# Altium PCB PCB_Shield_v1.PcbDoc
Units mil, origin at the board's own origin, x right, y up, seen from the top; angles counter-clockwise.
Board outline 3400 x 2200 mil, 2 copper layers (Top Layer, Bottom Layer); 41 components, 63 nets, 210 pads, 12 vias.
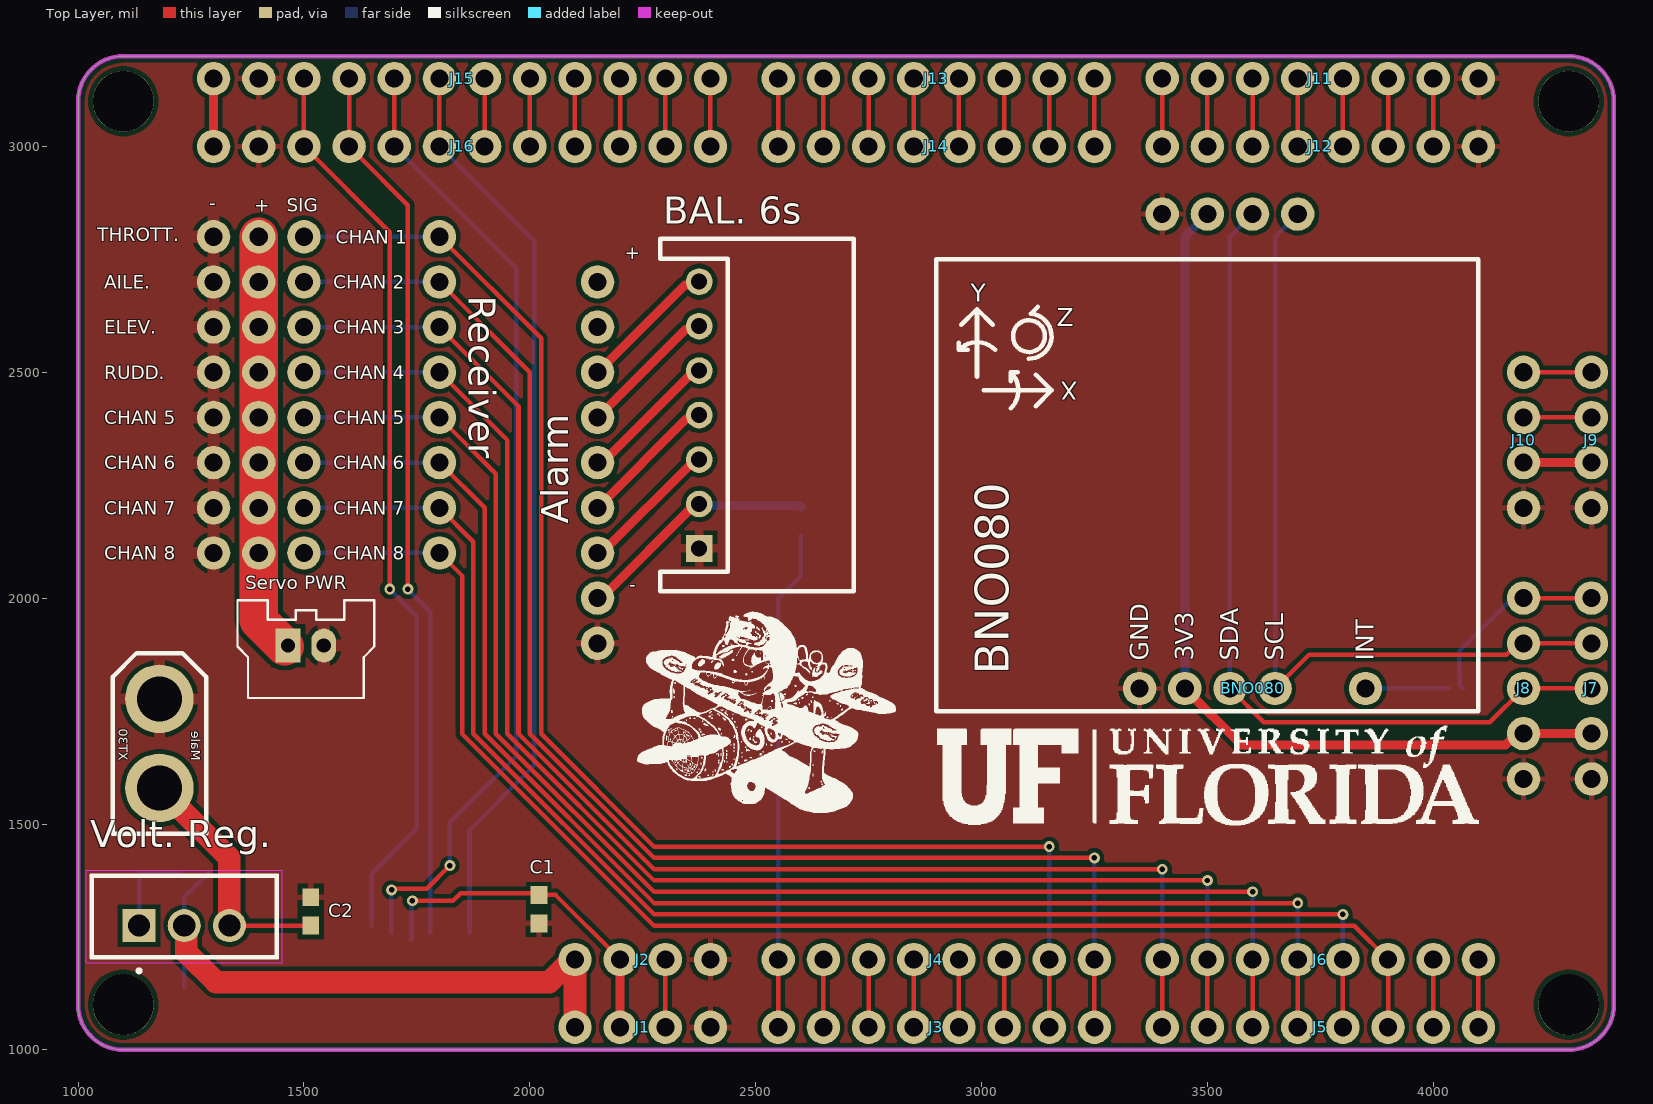
[diagram p0: Top Layer view]
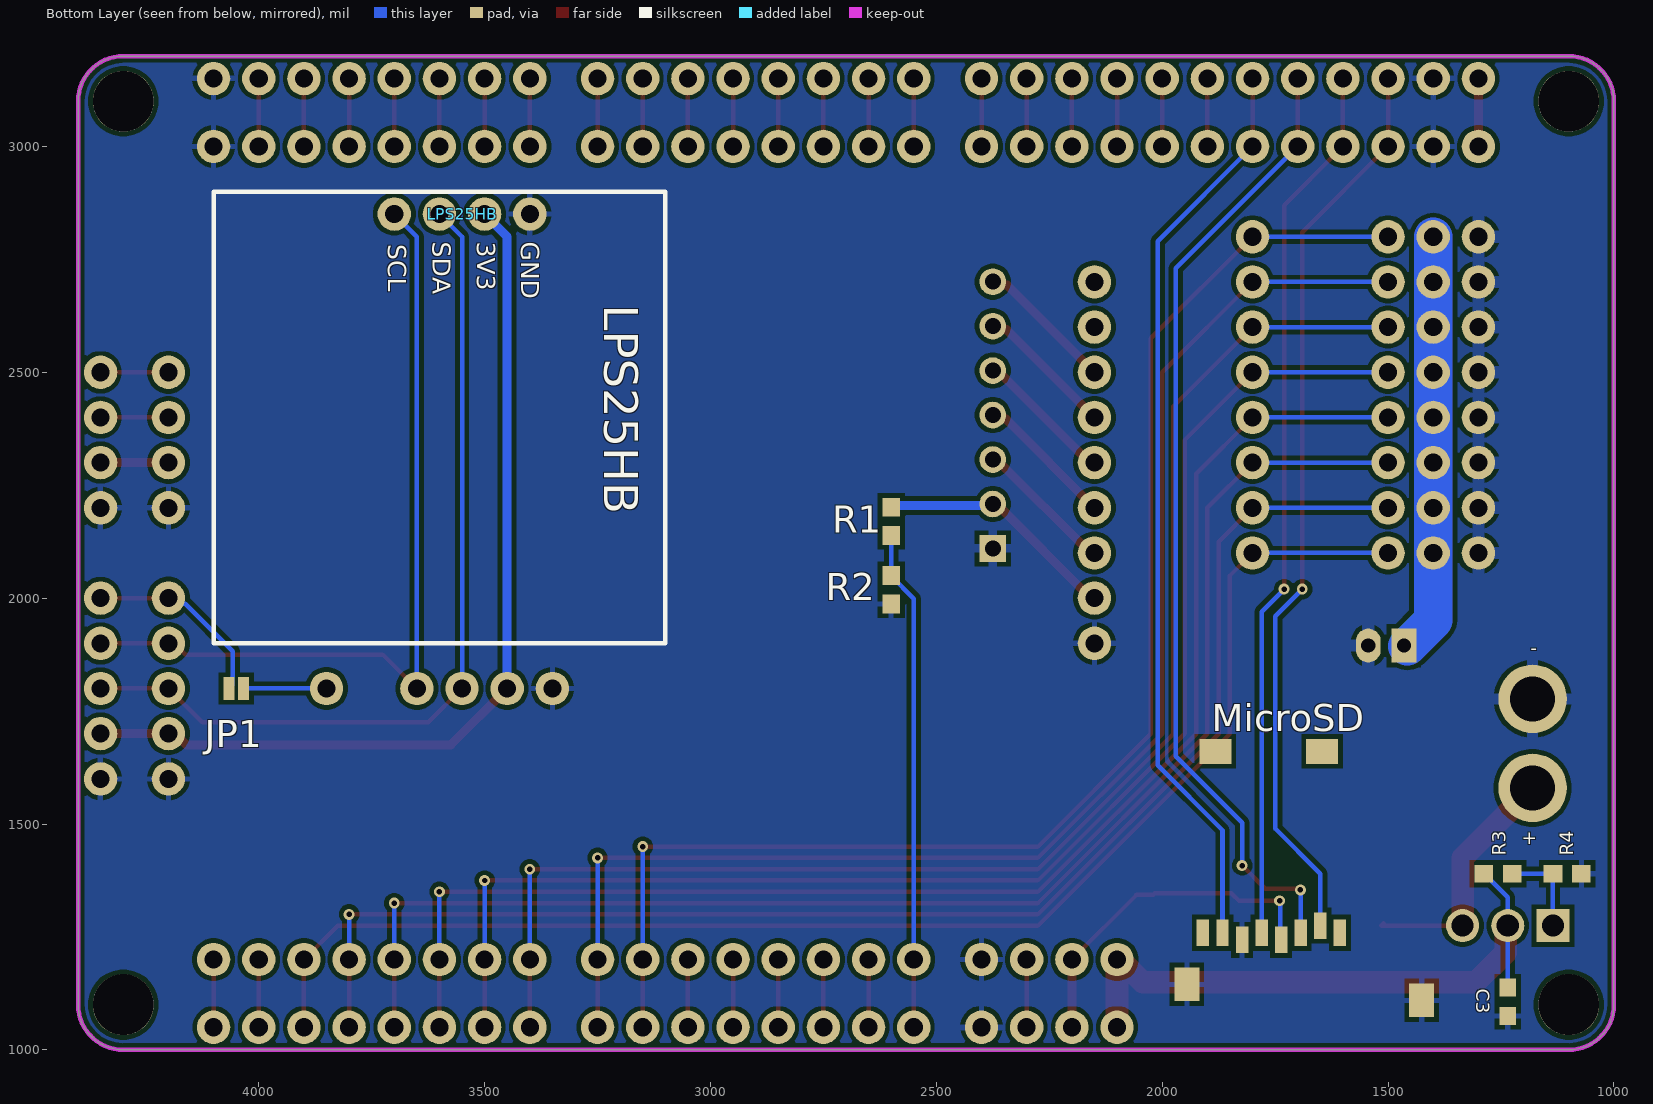
[diagram p1: Bottom Layer view, seen from below]

## Layer stack, top to bottom
Top Solder: solder mask 0.4, Solder Resist, Dk 3.5
Top Layer: signal copper 1.4
Dielectric 1: dielectric 12.6, FR-4, Dk 4.8
Bottom Layer: signal copper 1.4
Bottom Solder: solder mask 0.4, Solder Resist, Dk 3.5

## Board outline
1000,1100 1000,3100 cw(c1100,3100) 1100,3200 4300,3200 cw(c4300,3100) 4400,3100 4400,1100 cw(c4300,1100) 4300,1000 1100,1000 cw(c1100,1100)

## Design rules (kind name [scope] priority, off if disabled: settings)
Clearance [All] p1: gap=6 ignorepadtopadclearanceinfootprint=FALSE except(0: Arc-Hole Track-Hole SMDPad-Hole THPad-Hole Via-Hole Fill-Hole Poly-Hole Region-Hole Text-Hole; 10: Arc-Poly Track-Poly SMDPad-Poly THPad-Poly Via-Poly Fill-Poly)
HoleSize [All] p1: absolutevalues=TRUE maxlimit=135 minlimit=1 maxpercent=80.000 minpercent=20.000
MinimumSolderMaskSliver [All] p1: minsoldermaskwidth=8
PolygonConnect [All] p1: connectstyle=Relief reliefconductorwidth=12.5 reliefentries=4 polygonreliefangle="90 Angle" airgapwidth=10
RoutingVias [All] p1: holewidth=28 width=50 viastyle="Through Hole" minholewidth=28 minwidth=50 maxholewidth=28 maxwidth=50
SilkToSilkClearance [All] p1: silktosilkclearance=6
SilkToSolderMaskClearance [IsPad] p1: minsilkscreentomaskgap=7.5 clearancetoexposedcopper=TRUE
SolderMaskExpansion [All] p1: expansion=4 istentingtop=FALSE
Width [All] p1: maxlimit=100 minlimit=10 preferedwidth=10 minimp=50.000000 maximp=50.000000 favimp=50.000000
26 further rules are at their usual default settings.

## Components (designator, comment, footprint, x,y, rotation, side; value= is the part's Value field where it differs from the comment)
AILE. "" 1X03_NO_SILK 1300,2700 r0 top
Alarm "" 1X09_NO_SILK 2150,1900 r90 top
"BAL. 6s" "JST1x7" JST1x7 2375,2110 r90 top
BNO080 "BNO080" PCBComponent_1#1 3350,1800 r0 top
C1 "Cap" CAPC0603 2020,1311.5 r270 top value=100nF
C2 "Cap" CAPC0603 1515,1306.5 r90 top value=100nF
C3 "Cap" CAPC0603 1235,1106.5 r270 bottom value=1uF
"CHAN 5" "" 1X03_NO_SILK 1300,2400 r0 top
"CHAN 6" "" 1X03_NO_SILK 1300,2300 r0 top
"CHAN 7" "" 1X03_NO_SILK 1300,2200 r0 top
"CHAN 8" "" 1X03_NO_SILK 1300,2100 r0 top locked
ELEV. "" 1X03_NO_SILK 1300,2600 r0 top
J1 "" 1X04_NO_SILK 2400,1050 r180 top
J2 "" 1X04_NO_SILK 2400,1200 r180 top
J3 "" 1X08_NO_SILK 3250,1050 r180 top
J4 "" 1X08_NO_SILK 3250,1200 r180 top
J5 "" 1X08_NO_SILK 4100,1050 r180 top
J6 "" 1X08_NO_SILK 4100,1200 r180 top
J7 "" 1X05_NO_SILK 4350,1600 r90 top
J8 "" 1X05_NO_SILK 4200,1600 r90 top
J9 "" 1X04_NO_SILK 4350,2200 r90 top
J10 "" 1X04_NO_SILK 4200,2200 r90 top
J11 "" 1X08_NO_SILK 4100,3150 r180 top
J12 "" 1X08_NO_SILK 4100,3000 r180 top
J13 "" 1X08_NO_SILK 3250,3150 r180 top
J14 "" 1X08_NO_SILK 3250,3000 r180 top
J15 "" 1X12_NO_SILK 2400,3150 r180 top
J16 "" 1X12_NO_SILK 2400,3000 r180 top
JP1 "" SMT-JUMPER_2_NO_SILK 4050,1800 r0 bottom
LPS25HB "LPS25HB" PCBComponent_1#2 3400,2850 r0 bottom
MicroSD "Micro-SD / Transflash card holder with SPI pinout   For the 3M # 2908-05WB-MG and/or 4UCON #19656 push-push type" MICROSD 1961.02,1678.15 r180 bottom
R1 "Res" RES0603 2600,2170 r270 bottom value=10k
R2 "Res" RES0603 2600,2018.5 r270 bottom value=10k
R3 "Res" RES0603 1256.5,1390 r180 bottom value=300
R4 "Res" RES0603 1103.5,1390 r180 bottom value=1.05k
Receiver "" 1X08_NO_SILK 1800,2100 r90 top
RUDD. "" 1X03_NO_SILK 1300,2500 r0 top
"Servo PWR" "2-pin Vert Sherlock" MOLEX-HDR-1X2-SHERLOCK-VERT 1465,1895 r180 top
THROTT. "" 1X03_NO_SILK 1300,2800 r0 top
"Volt. Reg." "Check prices" TO254P1054X470X1955-3 1235,1275 r0 top
XT30 "XT30" PCBCOMPONENT_1 1180,1580 r90 top

## Footprints (in the part's own frame and the unit in brackets; to place one, negate y for a bottom-side part, rotate by r counter-clockwise, add the part's x,y. Pads: shape width x height; smd on the part's side, far side on the other; paste and mask are expansions set on the pad)
1X03_NO_SILK [mil]
  round 74 hole 40: 1(0,0) 2(100,0) 3(200,0)
1X04_NO_SILK [mil]
  round 74 hole 40: 1(0,0) 2(100,0) 3(200,0) 4(300,0)
1X05_NO_SILK [mil]
  round 74 hole 40: 1(0,0) 2(100,0) 3(200,0) 4(300,0) 5(400,0)
1X08_NO_SILK [mil]
  round 74 hole 40: 1(0,0) 2(100,0) 3(200,0) 4(300,0) 5(400,0) 6(500,0) 7(600,0) 8(700,0)
  body extent -60,-49 760,49, height 197
1X09_NO_SILK [mil]
  round 74 hole 40: 1(0,0) 2(100,0) 3(200,0) 4(300,0) 5(400,0) 6(500,0) 7(600,0) 8(700,0) 9(800,0)
  body extent -60,-49 860,49, height 197
1X12_NO_SILK [mil]
  round 74 hole 40: 1(0,0) 2(100,0) 3(200,0) 4(300,0) 5(400,0) 6(500,0) 7(600,0) 8(700,0) 9(800,0) 10(900,0) 11(1000,0) 12(1100,0)
CAPC0603 [mm] "Chip Capacitor, 2-Leads, Body 1.60x0.80mm, IPC Medium Density"
  rect 1x0.95 smd: 1(-0.8,0) 2(0.8,0)
  body extent -0.88,-0.48 0.87,0.48, height 0.8
JST1x7 [mm]
  rect 1.5x1.5 hole 0.9: 1(0,0)
  round 1.5 hole 0.9: 2(2.5,0) 3(5,0) 4(7.5,0) 5(10,0) 6(12.5,0) 7(15,0)
  silkscreen extent -2.4,-8.7 17.43,2.2, body extent -2.45,-9.2 17.45,2.35, height 6.17
MICROSD [mm]
  rect 0.7x1.5 smd: 1(9,-10.64) 2(7.9,-10.24) 3(6.8,-10.64) 4(5.7,-11.04) 5(4.6,-10.64) 6(3.5,-11.04) 7(2.4,-10.64) 8(1.3,-10.64)
  rect 1.8x1.4 smd: CD1(2,-0.44) CD2(8,-0.44)
  rect 1.4x1.9 smd: MT1(0.4,-13.54) MT2(13.6,-14.44)
  body extent -0.13,-15.32 13.97,0.13, height 1.85
MOLEX-HDR-1X2-SHERLOCK-VERT [mm]
  rect 1.397x1.905 hole 0.8: 1(0,0)
  oval 1.397x1.905 hole 0.8: 2(-2,0)
  silkscreen extent -4.85,-2.55 2.85,2.95, body extent -4.87,-2.59 2.83,2.96, height 8.5
PCBComponent_1#1 [mil]
  round 74 hole 40: 1(0,0) 2(100,0) 3(200,0) 4(300,0) 5(500,0)
  silkscreen extent -450,-50 750,950
PCBComponent_1#2 [mil]
  round 74 hole 40: 1(0,0) 2(100,0) 3(200,0) 4(300,0)
  silkscreen extent -300,-50 700,950
PCBCOMPONENT_1 [mil]
  round 151.7 hole 100: 1(0,0) 2(197,0)
  silkscreen extent -102,-104 298,104, body extent -105,-105 305,104, height 496
RES0603 [mm] "Chip Resistor, 2-Leads, Body 1.60x0.80mm, IPC Medium Density"
  rect 1.05x1 smd: 1(-0.8,0) 2(0.8,0)
  body extent -0.88,-0.48 0.87,0.47, height 0.8
SMT-JUMPER_2_NO_SILK [mil]
  rect 25x50 smd paste+0: 1(-16,0) 2(16,0)
TO254P1054X470X1955-3 [mil]
  rect 73.23x73.23 / inner round 67.66 / far side rect 73.23x73.23 hole 48.82: 1(-100,0)
  round 73.23 hole 48.82: 2(0,0) 3(100,0)
  Top Layer keep-out lines w1.97: -217.32,-82.28 217.32,-82.28 217.32,122.44 -217.32,122.44 -217.32,-82.28
  silkscreen extent -207,-104 207,113, body extent -200,-70 200,110, height 770

## Part data
AILE. "CHAN 5" "CHAN 6" "CHAN 7" "CHAN 8" ELEV. RUDD. THROTT.: library part CONN_031X03_NO_SILK, Package=1X03_NO_SILK, DeviceName=1X03_NO_SILK, DeviceSetName=CONN_03, GateName_1=J$1, LibraryName=SparkFun-Connectors, SymbolName_1=CONN_03
Alarm: library part CONN_09NO_SILK, Package=1X09_NO_SILK, DeviceName=NO_SILK, DeviceSetName=CONN_09, GateName_1=J1, LibraryName=SparkFun-Connectors, SymbolName_1=CONN_09
"BAL. 6s": "CONN HEADER XH SIDE 7POS 2.5MM", Supplier Part Number 1=455-2240-ND, Supplier 1=Digi-Key
BNO080: "BNO080 Breakout Board"
C1 C2 C3: Supplier Part Number 1=1276-1000-1-ND, Supplier 1=Digi-Key
J1 J2 J9 J10: library part CONN_041X04_NO_SILK, Package=1X04_NO_SILK, DeviceName=1X04_NO_SILK, DeviceSetName=CONN_04, GateName_1=J1, LibraryName=SparkFun-Connectors, PROD_ID=CONN-09696, SymbolName_1=CONN_04
J3 J4 J5 J6 J11 J12 J13 J14 Receiver: library part CONN_08NO_SILK_FEMALE_PTH, Package=1X08_NO_SILK, DeviceName=NO_SILK_FEMALE_PTH, DeviceSetName=CONN_08, GateName_1=G$1, LibraryName=SparkFun-Connectors, PROD_ID=CONN-08438, SymbolName_1=CONN_08
J7 J8: library part CONN_05NO_SILK, Package=1X05_NO_SILK, DeviceName=NO_SILK, DeviceSetName=CONN_05, GateName_1=G$1, LibraryName=SparkFun-Connectors, SymbolName_1=CONN_05
J15 J16: library part CONN_12NO_SILK, Package=1X12_NO_SILK, DeviceName=NO_SILK, DeviceSetName=CONN_12, GateName_1=G$1, LibraryName=SparkFun-Connectors, SymbolName_1=CONN_12
JP1: library part JUMPER-SMT_2_NO_SILK, Package=SMT-JUMPER_2_NO_SILK, DeviceName=_SILK, DeviceSetName=JUMPER-SMT_2_NO, GateName_1=G$1, LibraryName=SparkFun-Jumpers, SymbolName_1=SMT-JUMPER_2_NO
LPS25HB: "LPS25HB Breakout Board"
MicroSD: library part MICROSD, DeviceSetName=MICROSD, GateName_1=G$1, LibraryName=adafruit, Package=MICROSD, SymbolName_1=TRANSFLASH
R1 R2 R3 R4: Supplier Part Number 1=RMCF0603JT10K0CT-ND, Supplier 1=Digi-Key
"Servo PWR": library part MOLEX-HDR-1x2-SHERLOCK_VERT, "Header, Molex, 2mm Pitch Sherlock Header, Single Row, Vertical, 2 Circuits, Length 3.3mm, 0353620250"
"Volt. Reg.": library part LM338T, Package="TO-220-3 Texas Instruments", Availability=Warning, DeviceSetName=LM338T, GateName_1=G$1, LibraryName=LM338T, MF="Texas Instruments", MP=LM338T/NOPB, Price=None, Purchase-URL=https://pricing.snapeda.com/search/part/LM338T/NOPB/?ref=eda, SymbolName_1=LM338T

## Free pads (board coordinates)
  round 135 hole 135 unplated: 1(1100,1100) 2(4300,1100) 3(4300,3100) 4(1100,3100)

## Via types
v1: diameter 24, hole 12, Top Layer to Bottom Layer, 12 vias

## Nets (pads, with @x,y where several pads share a name; then routed paths per layer and width w, separated by ;. In a path a pad name is that pad's centre, name@x,y a point inside that pad or via, vN(x,y) a via of type N, cw(c..) or ccw(c..) an arc to the next point about the centre after c; other vN are vias at no path point)
"3V3 S1": C1.1 J1.3 J2.3 MicroSD.4 | length 765.8
  Top Layer w10: v1(1740,1330) 1830,1330 1847,1347 2015.99,1347 C1.1 2057.01,1342.99 J2.3
  Top Layer w20: J1.3 J2.3
  Bottom Layer w10: MicroSD.4 1738.31,1245.19 1738.31,1328.31 v1(1740,1330)
"3V3 S2": BNO080.2 J7.2 J8.2 LPS25HB.2 | length 2032.8
  Top Layer w20: BNO080.2 3575,1675 4160.39,1675 4185.39,1700 J8.2 J7.2
  Bottom Layer w20: BNO080.2 3450,2800 LPS25HB.2
"3V3 S3": J9.2 J10.2 | length 150
  Top Layer w20: J10.2 J9.2
"3V3 S4": J15.12 J16.12 | length 150
  Top Layer w20: J16.12 J15.12
A0: J3.8 J4.8 R1.2 R2.1 | length 1109.2
  Top Layer w10: J3.8 J4.8
  Bottom Layer w10: J4.8 2550,1999.02 2600,2049.02 R2.1 R1.2
A1: J3.7 J4.7 | length 150
  Top Layer w10: J3.7 J4.7
"CAN RX": J11.7 J12.7 | length 150
  Top Layer w10: J12.7 J11.7
"CAN TX": J11.6 J12.6 | length 150
  Top Layer w10: J12.6 J11.6
"CELL 1": "BAL. 6s.2" Alarm.2 R1.1 | length 561.3
  Top Layer w20: Alarm.2@2149,2001 Alarm.2 2158.29,2000 2366.71,2208.43 2375,2208.43
  Bottom Layer w20: Alarm.2 Alarm.2@2160.35,2000 ; 2364.65,2208.43 2375,2208.43 2378.46,2204.96 2596.54,2204.96 R1.1
"CELL 2": "BAL. 6s.3" Alarm.3 | length 333
  Top Layer w20: Alarm.3 2159.07,2100 2365.93,2306.85 2375,2306.85
  Bottom Layer w20: Alarm.3 Alarm.3@2161.71,2100 ; 2364.43,2306.85 2375,2306.85
"CELL 3": "BAL. 6s.4" Alarm.4 | length 337.1
  Top Layer w20: Alarm.4@2148.28,2198.28 Alarm.4 2347.8,2397.8 2367.53,2397.8 2375,2405.28 2374.43,2405.85
  Bottom Layer w20: Alarm.4 Alarm.4@2163.28,2200 ; 2364.43,2405.28 2375,2405.28
"CELL 4": "BAL. 6s.5" Alarm.5 | length 328.7
  Top Layer w20: Alarm.5@2146.7,2296.7 Alarm.5 2160.73,2300 2364.43,2503.7 2375,2503.7
  Bottom Layer w20: Alarm.5 Alarm.5@2160.33,2310.33
"CELL 5": "BAL. 6s.6" Alarm.6 | length 315.4
  Top Layer w20: Alarm.6@2145.28,2395.28 Alarm.6 2344.65,2594.65 2367.53,2594.65 2375,2602.13
"CELL 6": "BAL. 6s.7" Alarm.7 | length 317
  Top Layer w20: Alarm.7@2143.7,2493.7 Alarm.7 2343.08,2693.08 2367.53,2693.08 2375,2700.55
CIPO: J15.7 J16.7 MicroSD.7 | length 2037.2
  Top Layer w10: J16.7 J15.7
  Bottom Layer w10: J16.7 2010,2790 2010,1630 1866.53,1486.53 MicroSD.7
CIPO1: J15.3 J16.3 | length 150
  Top Layer w10: J16.3 J15.3
COPI: J15.8 J16.8 MicroSD.3 | length 2161.1
  Top Layer w10: v1(1694,1354) 1696.54,1356.54 1771.54,1356.54 v1(1823,1408) ; J16.8 J15.8
  Bottom Layer w10: MicroSD.3 1693.3,1353.3 v1(1694,1354) ; J16.8 1970,2730 1970,1650 1823,1503 v1(1823,1408)
COPI1: J15.2 J16.2 | length 150
  Top Layer w10: J16.2 J15.2
CS: J15.10 J16.10 MicroSD.2 | length 2019.9
  Top Layer w10: J15.10 J16.10 1690,2810 v1(1690,2020)
  Bottom Layer w10: MicroSD.2 1650,1390 1749.92,1489.92 1749.92,1960.08 v1(1690,2020)
CS1: J15.6 J16.6 | length 150
  Top Layer w10: J16.6 J15.6
CTS: J13.2 J14.2 | length 150
  Top Layer w10: J14.2 J13.2
D0: J11.3 J12.3 | length 150
  Top Layer w10: J12.3 J11.3
D1: J11.2 J12.2 | length 150
  Top Layer w10: J12.2 J11.2
DAT1: J15.4 J16.4 | length 150
  Top Layer w10: J16.4 J15.4
DAT2: J15.5 J16.5 | length 150
  Top Layer w10: J16.5 J15.5
G0: J3.2 J4.2 Receiver.8 THROTT..3 | length 3121.8
  Top Layer w10: Receiver.8 2025,2575 2025,1700 2275,1450 v1(3150,1450) ; J3.2 J4.2
  Bottom Layer w10: THROTT..3 Receiver.8 ; J4.2 v1(3150,1450)
G1: AILE..3 J3.1 J4.1 Receiver.7 | length 3121.8
  Top Layer w10: Receiver.7 2000,2500 2000,1700 2275,1425 v1(3250,1425) ; J3.1 J4.1
  Bottom Layer w10: AILE..3 Receiver.7 ; J4.1 v1(3250,1425)
G2: ELEV..3 J5.8 J6.8 Receiver.6 | length 3171.8
  Top Layer w10: Receiver.6 1975,2425 1975,1700 2275,1400 v1(3400,1400) ; J5.8 J6.8
  Bottom Layer w10: ELEV..3 Receiver.6 ; J6.8 v1(3400,1400)
G3: J5.7 J6.7 Receiver.5 RUDD..3 | length 3171.8
  Top Layer w10: Receiver.5 1950,2350 1950,1700 2275,1375 v1(3500,1375) ; J5.7 J6.7
  Bottom Layer w10: RUDD..3 Receiver.5 ; J6.7 v1(3500,1375)
G4: "CHAN 5.3" J5.6 J6.6 Receiver.4 | length 3171.8
  Top Layer w10: Receiver.4 1925,2275 1925,1700 2275,1350 v1(3600,1350) ; J5.6 J6.6
  Bottom Layer w10: 1500,2400 Receiver.4 ; J6.6 v1(3600,1350)
G5: "CHAN 6.3" J5.5 J6.5 Receiver.3 | length 3171.8
  Top Layer w10: Receiver.3 1900,2200 1900,1700 2275,1325 v1(3700,1325) ; J5.5 J6.5
  Bottom Layer w10: 1500,2300 Receiver.3 ; J6.5 v1(3700,1325)
G6: "CHAN 7.3" J5.4 J6.4 Receiver.2 | length 3171.8
  Top Layer w10: Receiver.2 1875,2125 1875,1700 2275,1300 v1(3800,1300) ; J5.4 J6.4
  Bottom Layer w10: 1500,2200 Receiver.2 ; J6.4 v1(3800,1300)
G7: "CHAN 8.3" J5.3 J6.3 Receiver.1 | length 3127.8
  Top Layer w10: Receiver.1 1850,2050 1850,1700 2275,1275 3825,1275 J6.3 J5.3
  Bottom Layer w10: 1500,2100 Receiver.1
G8: J5.2 J6.2 | length 150
  Top Layer w10: J5.2 J6.2
G9: J3.3 J4.3 | length 150
  Top Layer w10: J3.3 J4.3
G10: J3.4 J4.4 | length 150
  Top Layer w10: J3.4 J4.4
G11: J5.1 J6.1 | length 150
  Top Layer w10: J5.1 J6.1
GND: "BAL. 6s.1" "CHAN 5.1" "CHAN 6.1" "CHAN 7.1" "CHAN 8.1" "Servo PWR.2" AILE..1 Alarm.1 BNO080.1 C1.2 C2.2 C3.2 ELEV..1 J1.1 J2.1 J7.1 J8.1 J9.1 J10.1 J11.1 J12.1 J15.11 J16.11 LPS25HB.1 MicroSD.6 MicroSD.MT1 MicroSD.MT2 R2.2 R4.2 RUDD..1 THROTT..1 XT30.2 | length 25.8
  Top Layer w20: J16.11@1397.62,2997.62 J16.11
  Bottom Layer w20: THROTT..1 THROTT..1@1303.16,2803.16 ; J16.11@1397.62,2997.62 J16.11 ; Alarm.1 Alarm.1@2160.33,1910.33
"I2C CLK": J13.4 J14.4 | length 150
  Top Layer w10: J14.4 J13.4
"I2C FS": J13.5 J14.5 | length 150
  Top Layer w10: J14.5 J13.5
"I2C INT": J7.5 J8.5 JP1.2 | length 427.2
  Top Layer w10: J8.5 J7.5
  Bottom Layer w10: JP1.2 4058.5,1807.5 4058.5,1824.86 4057.5,1825.86 4057.5,1882.5 4162.75,1987.75 4187.75,1987.75 J8.5
"I2C SDI": J13.6 J14.6 | length 150
  Top Layer w10: J14.6 J13.6
"I2C SDO": J13.7 J14.7 | length 150
  Top Layer w10: J14.7 J13.7
MCLK: J13.8 J14.8 | length 150
  Top Layer w10: J14.8 J13.8
NetBNO080_5: BNO080.5 JP1.1 | length 184
  Bottom Layer w10: BNO080.5 JP1.1
NetR3_2: "Volt. Reg..1" R3.2 R4.1 | length 205
  Bottom Layer w10: 1135,1275 R4.1 R3.2
PWM0: J3.6 J4.6 | length 150
  Top Layer w10: J3.6 J4.6
PWM1: J3.5 J4.5 | length 150
  Top Layer w10: J3.5 J4.5
RESET: J1.2 J2.2 | length 150
  Top Layer w10: J1.2 J2.2
RTS: J13.3 J14.3 | length 150
  Top Layer w10: J14.3 J13.3
RX: J11.8 J12.8 | length 150
  Top Layer w10: J12.8 J11.8
RX2: J11.4 J12.4 | length 150
  Top Layer w10: J12.4 J11.4
SCK: J15.9 J16.9 MicroSD.5 | length 1973.5
  Top Layer w10: J15.9 1600,2985.91 1614.09,2985.91 1730,2870 v1(1730,2020)
  Bottom Layer w10: v1(1730,2020) 1779.92,1970.08 MicroSD.5
SCK1: J15.1 J16.1 | length 150
  Top Layer w10: J16.1 J15.1
SCL: BNO080.4 J7.4 J8.4 LPS25HB.4 | length 1812.1
  Top Layer w10: BNO080.4 3725,1875 4162.14,1875 4187.14,1900 J7.4
  Bottom Layer w10: BNO080.4 3650,2800 LPS25HB.4
SCL1: J9.4 J10.4 | length 150
  Top Layer w10: J10.4 J9.4
SDA: BNO080.3 J7.3 J8.3 LPS25HB.3 | length 1932.8
  Top Layer w10: BNO080.3 3625,1725 4125,1725 J8.3 J7.3
  Bottom Layer w10: BNO080.3 3550,2800 LPS25HB.3
SDA1: J9.3 J10.3 | length 150
  Top Layer w10: J10.3 J9.3
"Servo VCC": "CHAN 5.2" "CHAN 6.2" "CHAN 7.2" "CHAN 8.2" "Servo PWR.1" AILE..2 ELEV..2 RUDD..2 THROTT..2 | length 1861
  Top Layer w85: THROTT..2 AILE..2 ELEV..2 RUDD..2 1400,2400 1400,2300 1400,2200 1400,2100 1400,1950.47 1457.58,1892.88
  Bottom Layer w85: THROTT..2 AILE..2 ELEV..2 RUDD..2 1400,2400 1400,2300 1400,2200 1400,2100 1400,1950.71 1457.1,1893.62
TX: J13.1 J14.1 | length 150
  Top Layer w10: J14.1 J13.1
TX2: J11.5 J12.5 | length 150
  Top Layer w10: J12.5 J11.5
VIN: "Volt. Reg..2" C3.1 J1.4 J2.4 R3.1 | length 1394.2
  Top Layer w50: 1235,1275 1239.44,1270.56 1239.44,1215.56 1305,1150 2043.51,1150 2093.51,1200 J2.4 J1.4
  Bottom Layer w10: C3.1 1235,1275 1235,1337.99 1287.01,1390 R3.1
"VIN REG": "Volt. Reg..3" C2.1 XT30.1 | length 556.3
  Top Layer w10: 1335,1275 1510,1275 C2.1 C2.1@1510,1280
  Top Layer w50: XT30.1 1335,1425 1335,1275
pads on no net: Alarm.8 Alarm.9 MicroSD.1 MicroSD.8 MicroSD.CD1 MicroSD.CD2

## Polygon pours and split planes (outlines as drawn)
GND on Top Layer "GND_L01_P000" (solid, remove dead copper, pour order 0): 1000,3200 1000,1000 4400,1000 4400,3200
GND on Bottom Layer "GND_L02_P001" (solid, remove dead copper, pour order 1): 1000,3200 1000,1000 4400,1000 4400,3200

## Keep-outs
Keep-Out Layer:
  the board outline again, w10

## Silkscreen, mask and mechanical layers (free items; w line width, h text height)
Top Overlay:
  drawing of 180 lines, arcs and shapes, not listed
  text "-" at 1290,2860 h30
  text "+" at 1390,2855 h30
  text "SIG" at 1462.51,2855 h30
  text "CHAN 1" at 1570.03,2785 h30
  text "+" at 2215,2780 h30 r270
  text "CHAN 2" at 1565.03,2685 h30
  text "CHAN 3" at 1565.03,2585 h30
  text "CHAN 4" at 1565.03,2485 h30
  text "CHAN 5" at 1565.03,2385 h30
  text "CHAN 6" at 1565.03,2285 h30
  text "CHAN 7" at 1565.03,2185 h30
  text "CHAN 8" at 1565.03,2085 h30
  text "-" at 2220,2015 h30
  text "Male" at 1250,1640.01 h20 r270
Bottom Overlay:
  text "-" at 1170,1875 h30
  text "+" at 1170,1455 h30

## Text inside footprints (layer, text, board x,y; h text height)
BNO080: Top Overlay "Z" at 3166.5,2601.5 h40; Top Overlay "Y" at 2976.5,2656.5 h40; Top Overlay "X" at 3213.5,2478.5 h40 r180; Top Overlay "INT" at 3868.5,1861.5 h40 r90; Top Overlay "SCL" at 3668.5,1861.5 h40 r90; Top Overlay "SDA" at 3568.69,1861.5 h40 r90; Top Overlay "3V3" at 3468.89,1861.5 h40 r90; Top Overlay "GND" at 3369.08,1861.89 h40 r90
LPS25HB: Bottom Overlay "SCL" at 3713.5,2783.5 h40 r90; Bottom Overlay "SDA" at 3615.17,2788.5 h40 r90; Bottom Overlay "3V3" at 3516.83,2788.5 h40 r90; Bottom Overlay "GND" at 3418.5,2788.5 h40 r90